# Altium PCB JacdacPower 50.PcbDoc (part 2 of 2)
Units mm, origin at the board's own origin, x right, y up, seen from the top; angles counter-clockwise.
Board outline 32.34 x 38.04 mm, 2 copper layers (Top Layer, Bottom Layer), stack 1.525 mm thick; 99 components, 54 nets, 301 pads, 83 vias.
Unrouted connection lines stored in the file: 7.
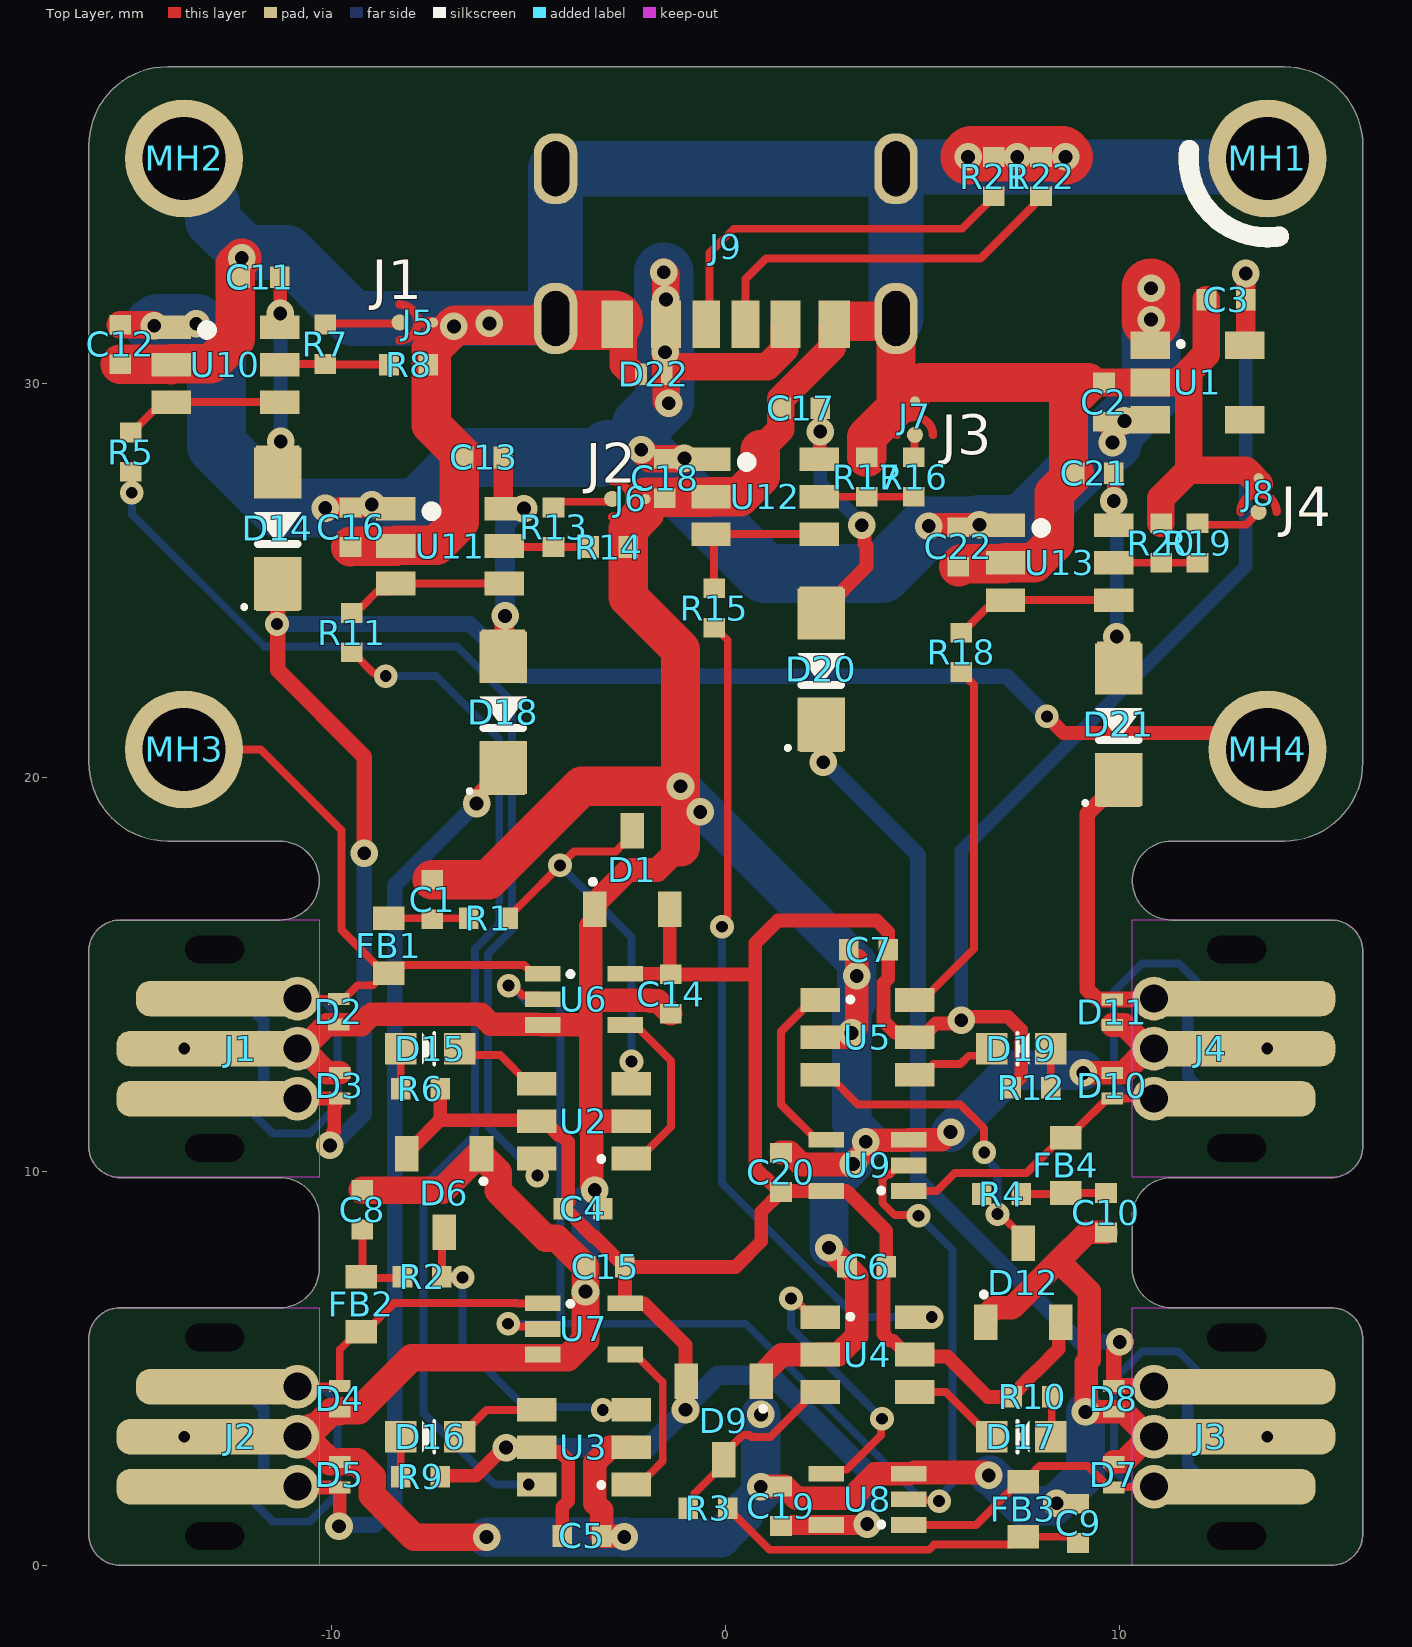
[diagram p0: Top Layer view]

## Via types
v1: diameter 0.7, hole 0.35, Top Layer to Bottom Layer, tented both sides, 59 vias
v2: diameter 0.6, hole 0.3, Top Layer to Bottom Layer, tented both sides, 24 vias

## Nets (pads, with @x,y where several pads share a name; then routed paths per layer and width w, separated by ;. In a path a pad name is that pad's centre, name@x,y a point inside that pad or via, vN(x,y) a via of type N, cw(c..) or ccw(c..) an arc to the next point about the centre after c; other vN are vias at no path point) (continued)
NetC11_2: (continued)
  Top Layer w0.5: D14.2@-11.375,27.725 -11.336,27.764 -11.336,28.489 v1(-11.297,28.528)
  Bottom Layer w0.35: v1(-11.311,31.777) -11.304,31.77 -11.304,28.535 v1(-11.297,28.528)
NetC13_2: C13.2 D18.2 U11.6 | length 5.9
  Top Layer w0.5: D18.2@-5.65,23.05 -5.626,23.074 -5.626,24.075 v1(-5.603,24.098) ; C13.2 -5.65,26.848 U11.6 v1(-5.123,26.823)
  Bottom Layer w0.5: v1(-5.603,24.098) -5.603,26.43 -5.248,26.784 -5.162,26.784 v1(-5.123,26.823)
NetC17_2: C17.2 D20.2 U12.6 | length 6.9
  Top Layer w0.35: U12.6 2.387,28.087 2.387,28.767 v1(2.398,28.778) ; v1@2.4,28.78 C17.2 ; D20.2@2.425,24.15 2.425,24.2 3.575,25.35 3.575,25.877 3.518,25.934 3.518,26.333 v1(3.451,26.4)
  Bottom Layer w0.35: v1(2.398,28.778) 2.398,27.494 3.451,26.441 v1(3.451,26.4)
NetC21_2: C21.2 D21.2 U13.6 | length 5.6
  Top Layer w0.35: U13.6 9.85,27.09 C21.2 ; v1(9.925,23.575) 9.925,22.8 D21.2@9.975,22.75
  Bottom Layer w0.35: v1(9.85,27.017) 9.917,26.95 9.917,26.702 9.925,26.694 v1(9.925,23.575)
NetD15_2: D15.2 R6.1 | length 1
  Top Layer w0.2: R6.1 D15.2
NetD16_2: D16.2 R9.1 | length 1
  Top Layer w0.2: R9.1 D16.2
NetD17_2: D17.2 R10.1 | length 1
  Top Layer w0.2: D17.2 8.275,3.29 R10.1
NetD19_2: D19.2 R12.1 | length 1
  Top Layer w0.2: R12.1 D19.2
NetJ5_1: J5.1 R7.1 | length 1.9
  Top Layer w0.2: R7.1 -10.14,31.522 -8.309,31.522 J5.1
NetJ6_1: J6.1 R13.1 | length 1.6
  Top Layer w0.2: R13.1 -4.227,26.996 -3.016,26.996 -2.943,27.069 J6.1
NetJ7_1: J7.1 R16.1 | length 0.6
  Top Layer w0.2: R16.1 4.787,28.137 4.787,28.681 J7.1
NetJ8_1: J8.1 R19.1 | length 1.7
  Top Layer w0.2: R19.1 12.011,26.414 13.203,26.414 13.525,26.736 J8.1
NetJ9_A5: J9.A5 R22.1 | length 9.6
  Top Layer w0.2: J9.A5 0.5,32.65 1.021,33.171 6.464,33.171 7.825,34.532 7.825,34.6 7.966,34.741 R22.1@8.034,34.741
NetJ9_B5: J9.B5 R21.1 | length 9.9
  Top Layer w0.2: J9.B5 -0.414,31.586 -0.414,33.309 0.204,33.928 5.996,33.928 R21.1@6.976,34.907
NetR5_1: R5.1 U10.3 U10.4 | length 4.1
  Top Layer w0.2: R5.1 -15.077,28.755 -14.507,29.325 -14.275,29.325 U10.3 U10.4
NetR7_2: R7.2 R8.2 U10.5 | length 2.8
  Top Layer w0.2: U10.5 -11.306,30.494 R7.2 -10.158,30.485 -8.56,30.485 R8.2
NetR11_1: R11.1 U11.3 U11.4 | length 4.2
  Top Layer w0.2: R11.1 -9.345,24.325 -9.244,24.325 -8.847,24.723 -8.575,24.723 U11.3 U11.4
NetR13_2: R13.2 R14.2 U11.5 | length 2.2
  Top Layer w0.2: U11.5 -5.602,25.85 R13.2 R13.2 -3.475,25.849 R14.2
NetR15_1: R15.1 U12.3 U12.4 | length 4.2
  Top Layer w0.2: R15.1 -0.295,26.095 U12.3 U12.4
NetR16_2: R16.2 R17.2 U12.5 | length 2.4
  Top Layer w0.2: U12.5 R17.2 R16.2
NetR18_1: R18.1 U13.3 U13.4 | length 4.2
  Top Layer w0.2: R18.1@6.005,23.68 6.625,24.3 6.9,24.3 U13.3 U13.4
NetR19_2: R19.2 R20.2 U13.5 | length 2.1
  Top Layer w0.2: U13.5 R20.2 R19.2
VUSB: C2.2 C12.2 C16.2 C18.2 C22.2 D22.1 J9.A9 J9.B9 U1.1 U1.3 U10.1 U11.1 U12.1 U13.1 | length 54
  Top Layer w0.5: v1(-10.168,26.836) -10.153,26.85 C16.2 -9.117,26.85 -9.042,26.924 v1(-8.988,26.924) ; C2.2 9.625,29.025 9.625,29 9.777,28.848 9.777,28.54 v1(9.816,28.501) 9.854,28.54 9.854,28.728 10.118,28.993 10.118,29.047 v1(10.122,29.05)
  Top Layer w0.6: v1(5.151,26.379) 5.178,26.379 5.213,26.414 v1(6.44,26.414)
  Top Layer w0.7: C12.2 -14.532,31.491 v1(-14.507,31.466) ; v1(-2.148,28.317) -1.921,28.09 v1@-1.06,28.09 ; v1(-1.575,32.825) -1.52,32.77 v1(-1.52,32.135) J9.A9 ; D22.1@-1.508,30.226 -1.508,29.558 v1(-1.45,29.5) ; J9.A9@-1.504,31.41 -1.54,31.374 v1(-1.54,30.79) -1.52,30.77 -1.52,30.254 D22.1 -1.309,30.425 1.047,30.425 1.49,30.868 1.49,31.47 J9.B9
  Top Layer w1.5: v1(10.795,31.621) v1(10.795,32.419)
  Bottom Layer w1.5: v1(-14.507,31.466) -14.473,31.466 -14.421,31.518 v1(-13.439,31.518) ; v1@-13.369,31.487 -12.928,31.046 -12.928,28.426 -11.338,26.836 v1@-9.077,26.836 ; v1@-9.018,26.836 -7.819,26.836 -6.539,28.116 -3.202,28.116 -3.001,28.317 v1(-2.148,28.317) ; v1(-1.575,32.825) -1.575,30.826 v1(-1.54,30.79) -1.54,29.542 -2.148,28.934 v1(-2.148,28.317) ; v1@5.151,26.368 3.958,25.175 0.994,25.175 v1(-2.148,28.317) ; v1(5.151,26.379) v1@6.421,26.379 ; v1(6.44,26.414) 7.515,26.414 9.602,28.501 v1(9.816,28.501) ; v1@9.587,28.516 v1(10.122,29.05) 10.795,29.723 v1(10.795,31.621) v1(10.795,32.419)
  other v1: -1.049,28.1
pads on no net: J1. J2. J3. J4. U1.4

## Silkscreen, mask and mechanical layers (free items; w line width, h text height)
Top Overlay:
  region: 212 vertices and 0 holes, not listed, extent 11.5,33.461 14.294,36.177
  text "J1" at -8.988,32.135 h1
  text "J3" at 5.475,28.2 h1
  text "J2" at -3.55,27.475 h1
  text "J4" at 14.084,26.379 h1
Bottom Overlay:
  rectangle: -3.175,19.225 -2.875,19.525
  rectangle: -2.575,19.225 -1.075,19.525
  rectangle: -0.775,19.225 0.125,19.525
  rectangle: 0.725,19.225 1.325,19.525
  rectangle: -3.175,18.925 -2.875,19.225
  rectangle: -3.175,18.625 -0.175,18.925
  rectangle: 0.125,18.625 0.425,18.925
  rectangle: 0.725,18.625 3.725,18.925
  rectangle: -0.775,18.925 -0.475,19.225
  rectangle: -0.175,18.925 0.125,19.225
  rectangle: 0.425,18.925 0.725,19.225
  rectangle: 1.025,18.925 1.325,19.225
  rectangle: 3.425,18.925 3.725,19.225
  rectangle: -3.175,19.525 -2.875,19.825
  rectangle: 1.625,19.225 3.125,19.525
  rectangle: 3.425,19.225 3.725,19.525
  rectangle: -2.575,19.525 -2.275,19.825
  rectangle: -1.375,19.525 -1.075,19.825
  rectangle: -0.775,19.525 -0.475,19.825
  rectangle: -0.175,19.525 0.125,19.825
  rectangle: 0.425,19.525 0.725,19.825
  rectangle: 1.025,19.525 1.325,19.825
  rectangle: 1.625,19.525 1.925,19.825
  rectangle: 2.825,19.525 3.125,19.825
  rectangle: 3.425,19.525 3.725,19.825
  rectangle: -3.175,19.825 -2.875,20.125
  rectangle: -2.575,19.825 -2.275,20.125
  rectangle: -1.375,19.825 -1.075,20.125
  rectangle: -0.775,19.825 0.125,20.125
  rectangle: 0.425,19.825 0.725,20.125
  rectangle: 1.025,19.825 1.325,20.125
  rectangle: 1.625,19.825 1.925,20.125
  rectangle: 2.825,19.825 3.125,20.125
  rectangle: -3.175,20.125 -2.875,20.425
  rectangle: 3.425,19.825 3.725,20.125
  rectangle: -2.575,20.125 -2.275,20.425
  rectangle: -1.375,20.125 -1.075,20.425
  rectangle: -0.775,20.125 0.125,20.425
  rectangle: 0.425,20.125 1.325,20.425
  rectangle: 1.625,20.125 1.925,20.425
  rectangle: 2.825,20.125 3.125,20.425
  rectangle: 3.425,20.125 3.725,20.425
  rectangle: -3.175,20.425 -2.875,20.725
  rectangle: -2.575,20.425 -1.075,20.725
  rectangle: -0.775,20.425 -0.475,20.725
  rectangle: 0.425,20.425 1.325,20.725
  rectangle: -3.175,20.725 -2.875,21.025
  rectangle: 1.625,20.425 3.125,20.725
  rectangle: 3.425,20.425 3.725,20.725
  rectangle: -0.775,20.725 -0.175,21.025
  rectangle: 0.125,20.725 0.725,21.025
  rectangle: 1.025,20.725 1.325,21.025
  rectangle: 3.425,20.725 3.725,21.025
  rectangle: -3.175,14.425 3.725,14.725
  rectangle: 2.525,14.725 3.125,15.025
  rectangle: -2.575,15.025 -1.075,15.325
  rectangle: -0.775,14.725 -0.475,15.025
  rectangle: 1.025,14.725 1.625,15.025
  rectangle: 1.925,14.725 2.225,15.025
  rectangle: -0.775,15.025 0.125,15.325
  rectangle: 1.025,15.025 1.325,15.325
  rectangle: 1.925,15.025 2.525,15.325
  rectangle: -0.775,15.325 -0.475,15.625
  rectangle: 0.425,15.625 1.325,15.925
  rectangle: -3.175,16.825 -0.475,17.125
  rectangle: -3.175,21.025 3.725,21.325
  rectangle: 3.425,14.725 3.725,15.025
  rectangle: -0.175,15.325 0.725,15.625
  rectangle: 1.025,15.325 1.325,15.625
  rectangle: 1.925,15.325 2.225,15.625
  rectangle: 2.825,15.325 3.125,15.625
  rectangle: 3.425,15.325 3.725,15.625
  rectangle: -3.175,14.725 -2.875,15.025
  rectangle: -3.175,15.325 -2.875,15.625
  rectangle: -2.575,15.325 -2.275,15.625
  rectangle: -1.375,15.325 -1.075,15.625
  rectangle: 3.425,15.025 3.725,15.325
  rectangle: -0.175,16.825 0.425,17.125
  rectangle: 0.725,16.825 1.625,17.125
  rectangle: 1.925,16.825 3.125,17.125
  rectangle: 3.425,16.825 3.725,17.125
  rectangle: -3.175,15.025 -2.875,15.325
  rectangle: -2.575,15.625 -2.275,15.925
  rectangle: -1.375,15.625 -1.075,15.925
  rectangle: -0.775,15.625 0.125,15.925
  rectangle: -3.175,15.625 -2.875,15.925
  rectangle: 1.925,15.625 2.225,15.925
  rectangle: 3.125,15.625 3.725,15.925
  rectangle: -3.175,15.925 -2.875,16.225
  rectangle: -2.575,15.925 -2.275,16.225
  rectangle: -1.375,15.925 -1.075,16.225
  rectangle: -0.775,15.925 -0.475,16.225
  rectangle: 0.125,15.925 0.425,16.225
  rectangle: 0.725,15.925 1.025,16.225
  rectangle: 1.625,15.925 2.225,16.225
  rectangle: 2.525,15.925 3.725,16.225
  rectangle: -3.175,16.225 -2.875,16.525
  rectangle: -2.575,16.225 -1.075,16.525
  rectangle: -0.775,16.225 -0.175,16.525
  rectangle: 0.125,16.225 0.425,16.525
  rectangle: -3.175,16.525 -2.875,16.825
  rectangle: 0.725,16.225 1.925,16.525
  rectangle: 2.225,16.225 2.525,16.525
  rectangle: 3.425,16.225 3.725,16.525
  rectangle: -0.775,16.525 0.125,16.825
  rectangle: 0.725,16.525 1.325,16.825
  rectangle: 1.625,16.525 2.225,16.825
  rectangle: 2.825,16.525 3.125,16.825
  rectangle: 3.425,16.525 3.725,16.825
  rectangle: -3.175,17.425 -2.275,17.725
  rectangle: 0.425,17.125 0.725,17.425
  rectangle: 1.925,17.125 3.125,17.425
  rectangle: 3.425,17.125 3.725,17.425
  rectangle: -1.675,17.425 -0.775,17.725
  rectangle: -0.475,17.425 -0.175,17.725
  rectangle: 0.425,17.425 0.725,17.725
  rectangle: 1.325,17.425 1.625,17.725
  rectangle: 2.225,17.425 3.725,17.725
  rectangle: -3.175,17.125 -2.875,17.425
  rectangle: -2.575,17.125 -2.275,17.425
  rectangle: -1.975,17.125 -1.675,17.425
  rectangle: -0.775,17.125 -0.175,17.425
  rectangle: -3.175,17.725 -2.875,18.025
  rectangle: -1.375,17.725 -1.075,18.025
  rectangle: -0.775,17.725 -0.475,18.025
  rectangle: -0.175,17.725 1.025,18.025
  rectangle: -3.175,18.025 -2.275,18.325
  rectangle: 1.325,17.725 1.625,18.025
  rectangle: 1.925,17.725 3.725,18.025
  rectangle: -1.975,18.025 0.425,18.325
  rectangle: 1.025,18.025 1.325,18.325
  rectangle: 3.425,18.025 3.725,18.325
  rectangle: -3.175,18.325 -2.875,18.625
  rectangle: -2.575,18.325 -2.275,18.625
  rectangle: -1.975,18.325 -1.675,18.625
  rectangle: -1.375,18.325 -1.075,18.625
  rectangle: -0.775,18.325 0.125,18.625
  rectangle: 0.725,18.325 1.925,18.625
  rectangle: 2.225,18.325 2.825,18.625
  rectangle: 3.125,18.325 3.725,18.625
  region: -1.473,23.212 -1.473,24.374 -3.498,24.374 -3.498,23.212
  region: 3.85,27.225 3.85,30.3 -3.425,30.3 -3.425,27.225
  text "JacdacPower" at 4.437,24.666 h1
  text "'.ProjectCodenameID'-'.ProjectRevision'" at 3.4,23.312 h1
Dimension:
  the board outline again, w0.05
Board Outline:
  the board outline again, w0.2
Top Assy:
  the board outline again, w0.05
Bottom Assy:
  the board outline again, w0.05

## Dimensions
-14.169,38.04 to -15.369,0 on Dimension
-16.168,36.04 to 16.17,36.04 on Dimension

## Text inside footprints (layer, text, board x,y; h text height)
J1: Mechanical 9 "JACDAC  / cable connector  / body" at -20.329,8.295 h1.7 r90; Alignment "board outline  / for 'innie'" at -8.34,17.646 h1.2 r90; Alignment "board outline  / for 'outie'" at -11.185,18.256 h1.2 r90
J2: Mechanical 9 "JACDAC  / cable connector  / body" at -20.329,-1.556 h1.7 r90; Alignment "board outline  / for 'innie'" at -8.34,7.795 h1.2 r90; Alignment "board outline  / for 'outie'" at -11.185,8.405 h1.2 r90
J3: Mechanical 9 "JACDAC  / cable connector  / body" at 20.329,8.086 h1.7 r270; Alignment "board outline  / for 'outie'" at 11.185,-1.875 h1.2 r270; Alignment "board outline  / for 'innie'" at 8.34,-1.265 h1.2 r270
J4: Mechanical 9 "JACDAC  / cable connector  / body" at 20.329,17.937 h1.7 r270; Alignment "board outline  / for 'outie'" at 11.185,7.976 h1.2 r270; Alignment "board outline  / for 'innie'" at 8.34,8.586 h1.2 r270
MH1: Assembly Notes "5mm dia keepout  / for traces and  / components to  / allow space for  / bushes/standoffs/ / nuts/screw heads" at 16.544,36.6 h0.5; Assembly Notes "board outline can  / be on 2.0mm   / radius if necessary" at 16.544,32.155 h0.5
MH2: Assembly Notes "5mm dia keepout  / for traces and  / components to  / allow space for  / bushes/standoffs/ / nuts/screw heads" at -16.544,34.822 h0.5 r180; Assembly Notes "board outline can  / be on 2.0mm   / radius if necessary" at -16.544,39.267 h0.5 r180
MH3: Assembly Notes "board outline can  / be on 2.0mm   / radius if necessary" at -16.544,24.267 h0.5 r180; Assembly Notes "5mm dia keepout  / for traces and  / components to  / allow space for  / bushes/standoffs/ / nuts/screw heads" at -16.544,19.822 h0.5 r180
MH4: Assembly Notes "5mm dia keepout  / for traces and  / components to  / allow space for  / bushes/standoffs/ / nuts/screw heads" at 16.544,21.6 h0.5; Assembly Notes "board outline can  / be on 2.0mm   / radius if necessary" at 16.544,17.155 h0.5